# Altium PCB SPI-主板-开关.PcbDoc (part 7 of 11)
Units mm, origin at the board's own origin, x right, y up, seen from the top; angles counter-clockwise.
Board outline 97.69 x 103.45 mm, 2 copper layers (Top Layer, Bottom Layer); 86 components, 63 nets, 260 pads, 250 vias.
Unrouted connection lines stored in the file: 6.
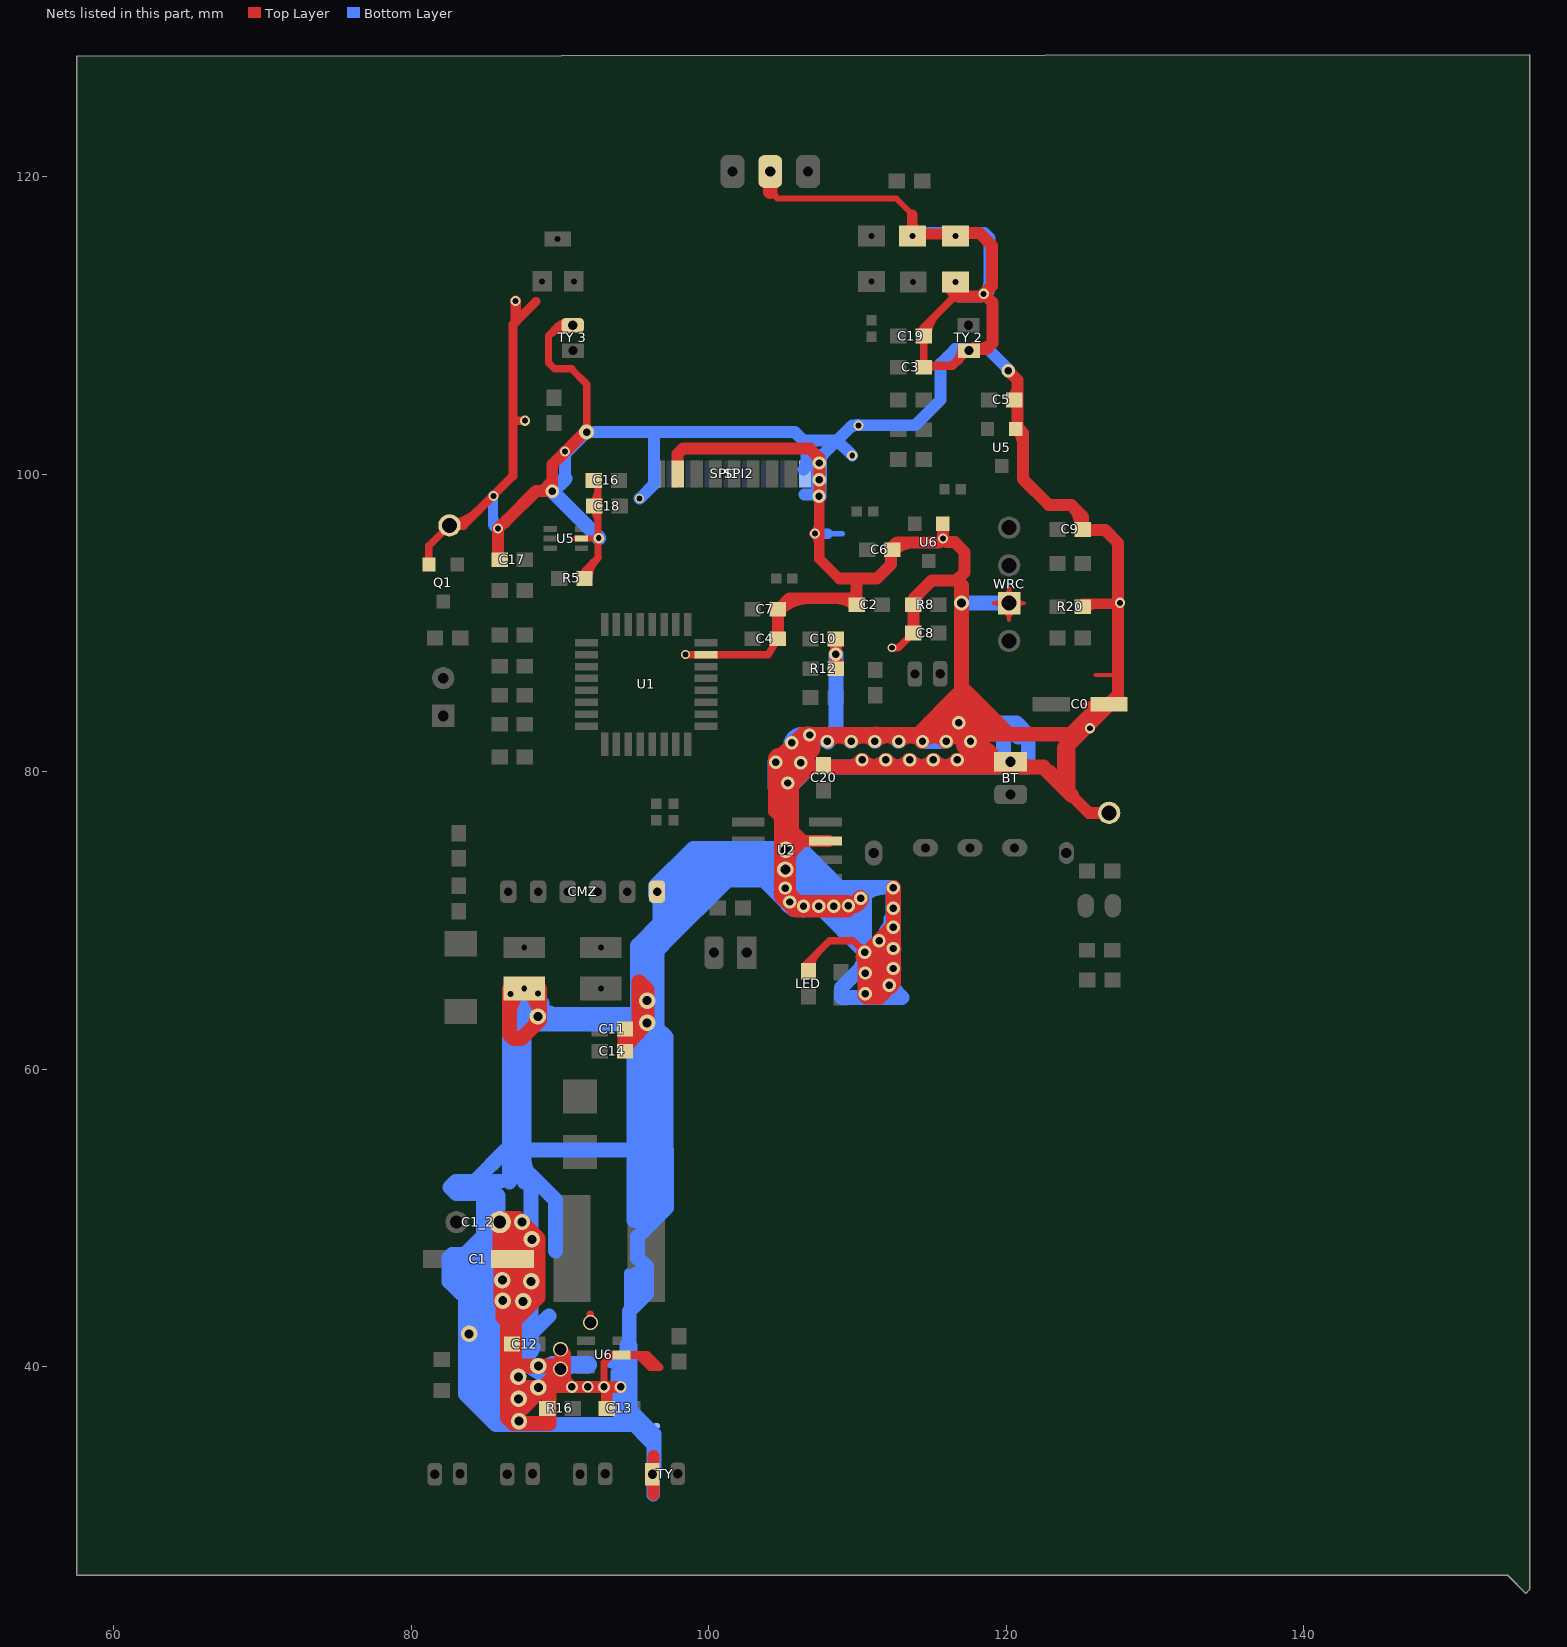
[diagram p7: the nets of this part, all layers, seen from the top]

## Via types
v1: diameter 0.9, hole 0.5, Top Layer to Bottom Layer, 104 vias
v2: diameter 0.68, hole 0.4, Top Layer to Bottom Layer, 100 vias
v3: diameter 1.1, hole 0.6, Top Layer to Bottom Layer, tented both sides, 16 vias
v4: diameter 1, hole 0.8, Top Layer to Bottom Layer, tented both sides, 8 vias
v5: diameter 1, hole 0.6, Top Layer to Bottom Layer, 4 vias
v6: diameter 0.8, hole 0.5, Top Layer to Bottom Layer, 4 vias
v7: diameter 0.7, hole 0.4, Top Layer to Bottom Layer, 4 vias
v8: diameter 0.6, hole 0.4, Top Layer to Bottom Layer, 3 vias
v9: diameter 1.1, hole 0.68, Top Layer to Bottom Layer, 2 vias
v10: diameter 0.8, hole 0.4, Top Layer to Bottom Layer, 2 vias
v11: diameter 1, hole 0.5, Top Layer to Bottom Layer, 1 vias
v12: diameter 0.9, hole 0.6, Top Layer to Bottom Layer, tented bottom, 1 vias
v13: diameter 1.2, hole 0.68, Top Layer to Bottom Layer, 1 vias

## Nets (pads, with @x,y where several pads share a name; then routed paths per layer and width w, separated by ;. In a path a pad name is that pad's centre, name@x,y a point inside that pad or via, vN(x,y) a via of type N, cw(c..) or ccw(c..) an arc to the next point about the centre after c; other vN are vias at no path point) (continued)
GND: (continued)
  Bottom Layer w1: 83.109,47.346 83.109,45.999 83.058,45.949 83.642,45.364 ; v3(83.896,42.215) 83.896,40.538 84.112,40.322 ; v3@84.099,42.603 84.099,44.907 ; 84.277,52.476 86.377,54.576 94.971,54.576 ; v3@84.404,42.298 84.741,42.298 84.995,42.552 ; 84.7,42.002 84.7,41.977 ; 84.712,41.99 84.7,41.977 ; 84.861,51.689 84.861,51.638 ; 85.014,50.343 85.014,43.993 ; 85.09,50.343 85.09,49.657 C1_2.1@85.42,49.327 ; 85.119,41.279 85.271,41.431 86.055,42.215 ; 85.242,40.366 85.242,39.192 ; 85.344,50.673 85.42,50.673 ; 85.852,48.654 85.852,51.486 84.861,52.476 ; 85.862,46.304 85.555,46.612 ; 86.004,52.476 84.861,52.476 ; 86.614,36.386 86.614,39.167 84.734,41.046 ; 86.614,52.426 86.614,63.833 ; 86.778,54.872 86.778,54.951 ; 86.868,41.021 86.893,41.046 ; 87.147,42.792 87.916,43.561 ; v3@87.396,44.071 86.792,43.466 ; 87.6,52.68 87.6,62.944 ; 87.8,53.119 88.062,52.857 ; 89.256,43.409 88.062,42.215 ; 89.704,47.777 89.704,51.215 88.062,52.857 ; 90.348,99.72 v1(89.484,98.857) 92.608,95.733 v2(92.608,95.707) ; 94.615,37.186 94.656,37.144 ; 94.742,36.108 86.055,36.108 ; 94.971,49.835 94.971,54.576 ; 94.971,62.407 94.971,54.576 ; 95.098,49.835 95.758,50.495 ; 95.148,46.228 95.148,44.806 95.225,44.729 ; 95.326,50.927 95.326,51.155 ; TY.2@96.314,32.774 96.314,34.774 ; 96.52,68.123 96.52,62.789 97.13,62.179 97.13,54.576 ; CMZ.2@96.53,71.944 97.866,71.944 99.274,71.944 99.606,72.276 ; 96.901,50.419 96.901,54.576 ; 97.13,50.648 97.13,54.576 ; v9(105.181,74.752) 106.274,74.752 108.179,72.847 108.179,72.517 ; 106.136,72.507 106.451,72.822 106.959,73.33 ; v1@107.298,98.645 v1(107.417,98.527) ; v1@107.417,98.501 v1(107.417,98.527) ; v1@107.417,99.593 v1(107.417,98.527) ; v1@107.442,99.492 v1(107.442,99.644) v1(107.442,100.762) v1@107.442,101.092 ; 107.518,73.508 108.788,72.238 ; v1@108.179,70.915 v1@108.179,70.917 ; 108.179,71.806 108.179,72.517 ; v1@108.56,87.909 108.56,82.525 ; 110.134,69.52 109.41,70.244 ; v1(114.375,82.042) 115.545,82.042 116.027,82.525 ; v5@117.17,91.345 WRC.2@120.2,91.345 ; 120.828,82.321 119.99,83.16 119.99,83.287 ; 83.642,44.907 84.099,44.907 ; 83.642,44.907 83.363,44.907 82.55,45.72 82.55,47.346 82.752,47.547 83.642,47.547 ; 83.642,44.907 83.642,45.364 ; 83.642,44.907 83.642,43.06 83.642,38.151 84.112,37.681 ; 83.642,45.364 84.099,44.907 ; 83.642,45.364 83.642,47.547 ; 83.642,47.547 83.947,47.547 84.099,47.395 84.099,44.907 ; 83.642,47.547 83.642,47.6 84.861,48.819 84.861,51.638 ; 83.708,45.202 cw(c82.765,44.258) 84.099,44.258 ; 83.708,45.202 cw(c81.416,42.909) 84.658,42.909 ; 83.708,45.202 cw(c82.765,44.258) 84.099,44.258 ; 83.708,45.202 cw(c81.416,42.909) 84.658,42.909 ; 83.708,45.202 cw(c82.765,44.258) 84.099,44.258 ; 83.708,45.202 cw(c81.416,42.909) 84.658,42.909 ; 83.708,45.273 ccw(c82.765,46.217) 84.099,46.217 ; 83.708,45.273 ccw(c81.416,47.566) 84.658,47.566 ; 83.708,45.273 ccw(c82.765,46.217) 84.099,46.217 ; 83.708,45.273 ccw(c81.416,47.566) 84.658,47.566 ; 83.708,45.273 ccw(c82.765,46.217) 84.099,46.217 ; 83.708,45.273 ccw(c81.416,47.566) 84.658,47.566 ; 84.099,44.907 85.014,43.993 ; 84.112,37.681 85.685,36.108 86.055,36.108 ; 84.112,37.681 84.7,37.681 ; 84.112,37.681 84.112,40.322 ; 84.112,40.322 84.112,41.389 84.7,41.977 ; 84.112,40.322 84.7,39.735 ; 84.7,37.681 85.103,37.681 85.242,37.821 ; 84.7,37.681 84.7,39.735 ; 84.7,37.681 84.7,37.464 86.055,36.108 ; 84.7,39.735 85.242,39.192 ; 84.7,39.735 84.7,41.977 ; 84.734,41.046 ccw(c86.12,42.432) 86.354,40.486 ; 84.734,41.046 ccw(c86.12,42.432) 86.354,40.486 ; 84.734,41.046 ccw(c86.12,42.432) 86.354,40.486 ; 84.734,41.046 85.656,41.046 ; 84.861,51.638 83.033,51.638 82.601,52.07 83.007,52.476 84.861,52.476 ; 84.995,42.552 85.014,42.57 ; 84.995,42.552 85.014,42.552 85.014,42.57 ; 84.995,42.552 84.741,42.552 85.014,42.824 ; 85.014,42.57 85.014,42.824 ; 85.014,42.57 85.598,43.155 85.598,43.409 85.555,43.452 ; 85.014,42.824 85.014,43.993 ; 85.014,42.824 85.555,43.365 85.555,43.452 ; 85.014,43.993 85.555,43.452 ; 85.242,37.821 85.496,38.075 85.496,37.16 85.166,37.49 85.242,37.567 85.242,37.821 ; 85.242,37.821 85.242,39.192 ; 85.242,39.192 86.055,38.379 86.055,36.108 ; 85.242,46.924 cw(c85.685,46.482) 86.122,46.929 ; 85.242,46.924 cw(c85.685,46.482) 86.122,46.929 ; 85.242,46.924 cw(c85.685,46.482) 86.122,46.929 ; 85.242,46.924 85.42,47.102 ; 85.242,46.924 85.555,46.612 ; 85.42,46.912 cw(c87.084,46.912) 86.159,48.295 ; 85.42,46.912 cw(c87.084,46.912) 86.159,48.295 ; 85.42,46.912 cw(c87.084,46.912) 86.159,48.295 ; 85.42,47.102 ccw(c85.837,47.519) 86.132,47.008 ; 85.42,47.102 ccw(c85.837,47.519) 86.132,47.008 ; 85.42,47.102 ccw(c85.837,47.519) 86.132,47.008 ; 85.42,47.102 85.555,46.967 85.555,46.612 ; 85.42,47.102 C1_2.1@85.42,49.327 ; 85.42,47.102 85.95,47.632 ; 85.42,48.864 ccw(c88.056,48.864) 86.192,47 ; 85.42,48.864 ccw(c88.056,48.864) 86.192,47 ; 85.42,48.864 ccw(c88.056,48.864) 86.192,47 ; C1_2.1@85.42,49.327 ccw(c86.395,49.327) 86.144,48.385 ; C1_2.1@85.42,49.327 ccw(c86.395,49.327) 86.144,48.385 ; C1_2.1@85.42,49.327 ccw(c86.395,49.327) 86.144,48.385 ; 85.555,43.452 85.555,46.612 ; 85.555,45.391 cw(c87.731,45.391) 86.192,46.929 ; 85.555,45.391 cw(c87.731,45.391) 86.192,46.929 ; 85.555,45.391 cw(c87.731,45.391) 86.192,46.929 ; 85.555,46.267 cw(c86.204,46.267) 86.16,46.915 ; 85.555,46.267 cw(c86.204,46.267) 86.16,46.915 ; 85.555,46.267 cw(c86.204,46.267) 86.16,46.915 ; 85.555,46.267 cw(c86.204,46.267) 86.16,46.915 ; 85.555,46.267 cw(c86.204,46.267) 86.16,46.915 ; 85.555,46.267 cw(c86.204,46.267) 86.16,46.915 ; 85.656,41.046 cw(c85.656,40.391) 86.31,40.434 ; 85.656,41.046 cw(c85.656,40.391) 86.31,40.434 ; 85.656,41.046 cw(c85.656,40.391) 86.31,40.434 ; 85.674,41.046 cw(c85.674,40.41) 86.31,40.435 ccw(c85.674,40.41) 85.674,41.046 ; 85.674,41.046 86.893,41.046 ; 85.676,47.358 ccw(c84.698,48.336) 86.081,48.336 ; 85.676,47.358 ccw(c84.698,48.336) 86.081,48.336 ; 85.676,47.358 ccw(c84.698,48.336) 86.081,48.336 ; 85.95,42.624 85.95,47.632 ; 85.95,42.624 86.792,43.466 ; 85.95,42.624 85.95,42.472 86.792,43.314 86.792,43.466 ; 85.95,46.345 cw(c86.777,46.345) 86.192,46.929 ; 85.95,46.345 cw(c86.777,46.345) 86.192,46.929 ; 85.95,46.345 cw(c86.777,46.345) 86.192,46.929 ; 85.95,47.585 ccw(c86.777,47.585) 86.192,47 ; 85.95,47.585 ccw(c86.777,47.585) 86.192,47 ; 85.95,47.585 ccw(c86.777,47.585) 86.192,47 ; 85.95,47.585 ccw(c86.777,47.585) 86.192,47 ; 85.95,47.585 ccw(c86.777,47.585) 86.192,47 ; 85.95,47.585 ccw(c86.777,47.585) 86.192,47 ; 85.95,47.585 ccw(c86.777,47.585) 86.192,47 ; 85.95,47.585 ccw(c86.777,47.585) 86.192,47 ; 85.95,47.585 ccw(c86.777,47.585) 86.192,47 ; 85.95,47.632 ccw(c85.506,48.075) 86.085,48.317 ; 85.95,47.632 ccw(c85.506,48.075) 86.085,48.317 ; 85.95,47.632 ccw(c85.506,48.075) 86.085,48.317 ; 85.95,47.632 ccw(c85.506,48.075) 86.085,48.317 ; 85.95,47.632 ccw(c85.506,48.075) 86.085,48.317 ; 85.95,47.632 ccw(c85.506,48.075) 86.085,48.317 ; 85.95,47.632 86.792,48.473 ; 85.95,47.778 cw(c86.69,47.778) 86.167,48.301 ; 85.95,47.778 cw(c86.69,47.778) 86.167,48.301 ; 85.95,47.778 cw(c86.69,47.778) 86.167,48.301 ; 85.95,47.778 cw(c86.69,47.778) 86.167,48.301 ; 85.95,47.778 cw(c86.69,47.778) 86.167,48.301 ; 85.95,47.778 cw(c86.69,47.778) 86.167,48.301 ; 85.95,47.778 cw(c86.69,47.778) 86.167,48.301 ; 85.95,47.778 cw(c86.69,47.778) 86.167,48.301 ; 85.95,47.778 cw(c86.69,47.778) 86.167,48.301 ; 85.95,48.895 ccw(c86.69,48.895) 86.167,48.372 ; 85.95,48.895 ccw(c86.69,48.895) 86.167,48.372 ; 85.95,48.895 ccw(c86.69,48.895) 86.167,48.372 ; 86.032,47.242 cw(c86.712,47.693) 86.165,48.299 ; 86.032,47.242 cw(c86.712,47.693) 86.165,48.299 ; 86.032,47.242 cw(c86.712,47.693) 86.165,48.299 ; 86.032,47.242 cw(c86.712,47.693) 86.165,48.299 ; 86.032,47.242 cw(c86.712,47.693) 86.165,48.299 ; 86.032,47.242 cw(c86.712,47.693) 86.165,48.299 ; 86.048,41.046 cw(c86.048,38.931) 87.544,40.427 ; 86.048,41.046 cw(c86.048,38.931) 87.544,40.427 ; 86.048,41.046 cw(c86.048,38.931) 87.544,40.427 ; 86.096,48.301 cw(c84.416,46.621) 86.792,46.621 ; 86.096,48.301 cw(c84.416,46.621) 86.792,46.621 ; 86.096,48.301 cw(c84.416,46.621) 86.792,46.621 ; 86.102,48.296 cw(c85.656,47.674) 86.288,47.241 ; 86.102,48.296 cw(c85.656,47.674) 86.288,47.241 ; 86.102,48.296 cw(c85.656,47.674) 86.288,47.241 ; 86.102,48.296 cw(c85.656,47.674) 86.288,47.241 ; 86.102,48.296 cw(c85.656,47.674) 86.288,47.241 ; 86.102,48.296 cw(c85.656,47.674) 86.288,47.241 ; 86.11,48.291 cw(c85.896,47.826) 86.392,47.701 ; 86.11,48.291 cw(c85.896,47.826) 86.392,47.701 ; 86.11,48.291 cw(c85.896,47.826) 86.392,47.701 ; 86.11,48.291 cw(c85.896,47.826) 86.392,47.701 ; 86.11,48.291 cw(c85.896,47.826) 86.392,47.701 ; 86.11,48.291 cw(c85.896,47.826) 86.392,47.701 ; 86.121,46.929 cw(c84.503,45.311) 86.792,45.311 ; 86.121,46.929 cw(c84.503,45.311) 86.792,45.311 ; 86.121,46.929 cw(c84.503,45.311) 86.792,45.311 ; 86.123,47.002 ccw(c85.58,47.6) 86.266,48.027 ; 86.123,47.002 ccw(c85.58,47.6) 86.266,48.027 ; 86.123,47.002 ccw(c85.58,47.6) 86.266,48.027 ; 86.124,47.002 ccw(c84.838,48.473) 86.792,48.473 ; 86.124,47.002 ccw(c84.838,48.473) 86.792,48.473 ; 86.124,47.002 ccw(c84.838,48.473) 86.792,48.473 ; 86.152,48.382 ccw(c86.391,48.925) 86.859,48.56 ; 86.152,48.382 ccw(c86.391,48.925) 86.859,48.56 ; 86.152,48.382 ccw(c86.391,48.925) 86.859,48.56 ; 86.152,48.382 ccw(c86.391,48.925) 86.859,48.56 ; 86.152,48.382 ccw(c86.391,48.925) 86.859,48.56 ; 86.152,48.382 ccw(c86.391,48.925) 86.859,48.56 ; 86.155,48.38 ccw(c86.411,48.854) 86.792,48.473 ; 86.155,48.38 ccw(c86.411,48.854) 86.792,48.473 ; 86.155,48.38 ccw(c86.411,48.854) 86.792,48.473 ; 86.207,46.967 cw(c88.209,47.056) 86.792,48.473 ; 86.207,46.967 cw(c88.209,47.056) 86.792,48.473 ; 86.207,46.967 cw(c88.209,47.056) 86.792,48.473 ; 86.395,40.401 cw(c87.952,38.844) 87.952,41.046 ; 86.395,40.401 cw(c87.952,38.844) 87.952,41.046 ; 86.395,40.401 cw(c87.952,38.844) 87.952,41.046 ; 86.401,40.408 cw(c86.939,40.029) 87.286,40.587 ; 86.401,40.408 cw(c86.939,40.029) 87.286,40.587 ; 86.401,40.408 cw(c86.939,40.029) 87.286,40.587 ; 86.401,40.408 cw(c86.939,40.029) 87.286,40.587 ; 86.41,40.442 cw(c88.957,40.691) 87.147,42.501 ; 86.41,40.442 cw(c88.957,40.691) 87.147,42.501 ; 86.41,40.442 cw(c88.957,40.691) 87.147,42.501 ; 86.646,40.553 cw(c87.017,39.941) 87.543,40.428 ; 86.646,40.553 cw(c87.017,39.941) 87.543,40.428 ; 86.646,40.553 cw(c87.017,39.941) 87.543,40.428 ; 86.731,53.985 ccw(c84.633,56.083) 87.6,56.083 ; 86.731,53.985 ccw(c84.633,56.083) 87.6,56.083 ; 86.731,53.985 ccw(c84.633,56.083) 87.6,56.083 ; 86.742,53.906 cw(c85.902,52.43) 87.6,52.43 ; 86.742,53.906 cw(c85.902,52.43) 87.6,52.43 ; 86.742,53.906 cw(c85.902,52.43) 87.6,52.43 ; 86.792,43.466 86.792,48.473 ; 86.792,45.015 cw(c89.427,45.015) 87.564,46.878 ; 86.792,45.015 cw(c89.427,45.015) 87.564,46.878 ; 86.792,45.015 cw(c89.427,45.015) 87.564,46.878 ; 86.792,48.473 ccw(c88.681,48.473) 87.558,46.954 ; 86.792,48.473 ccw(c88.681,48.473) 87.558,46.954 ; 86.792,48.473 ccw(c88.681,48.473) 87.558,46.954 ; 86.893,41.046 88.062,42.215 ; 86.893,41.046 88.062,41.046 88.062,42.215 ; 87.493,46.878 cw(c86.12,45.505) v3@88.062,45.505 ; 87.493,46.878 cw(c86.12,45.505) v3@88.062,45.505 ; 87.493,46.878 cw(c86.12,45.505) v3@88.062,45.505 ; 87.494,46.95 ccw(c86.267,48.26) v3@88.062,48.26 ; 87.494,46.95 ccw(c86.267,48.26) v3@88.062,48.26 ; 87.494,46.95 ccw(c86.267,48.26) v3@88.062,48.26 ; 87.544,40.498 ccw(c86.293,41.748) 88.062,41.748 ; 87.544,40.498 ccw(c86.293,41.748) 88.062,41.748 ; 87.544,40.498 ccw(c86.293,41.748) 88.062,41.748 ; 87.554,40.506 ccw(c86.877,41.679) 88.185,41.328 ; 87.554,40.506 ccw(c86.877,41.679) 88.185,41.328 ; 87.554,40.506 ccw(c86.877,41.679) 88.185,41.328 ; 87.6,53.869 ccw(c89.124,53.869) 88.046,52.791 ; 87.6,53.869 ccw(c89.124,53.869) 88.046,52.791 ; 87.6,53.869 ccw(c89.124,53.869) 88.046,52.791 ; 87.615,40.498 ccw(c89.785,42.668) v4@89.785,39.599 ; 87.615,40.498 ccw(c89.785,42.668) v4@89.785,39.599 ; 87.615,40.498 ccw(c89.785,42.668) v4@89.785,39.599 ; 87.622,40.488 ccw(c89.521,41.627) 88.984,39.479 ; 87.622,40.488 ccw(c89.521,41.627) 88.984,39.479 ; 87.622,40.488 ccw(c89.521,41.627) 88.984,39.479 ; 88.062,42.215 v3(88.062,45.745) 88.062,52.857 ; 94.656,37.144 94.656,43.729 95.809,44.882 95.809,46.736 95.225,47.32 95.225,48.743 97.176,50.694 97.176,54.576 97.13,54.576 ; 94.656,37.144 96.314,35.486 96.314,34.774 ; 94.656,37.144 94.656,36.432 96.314,34.774 ; 94.971,54.576 96.901,54.576 ; 95.747,65.25 cw(c95.429,64.206) 96.52,64.206 ; 95.747,65.25 cw(c95.429,64.206) 96.52,64.206 ; 95.747,65.25 cw(c95.429,64.206) 96.52,64.206 ; 95.758,50.495 96.368,49.886 96.368,50.165 96.266,50.063 96.266,62.509 96.52,62.763 ; 95.758,50.495 95.327,50.926 95.327,62.763 96.52,62.763 ; 95.768,65.166 ccw(c93.952,66.982) 96.52,66.982 ; 95.768,65.166 ccw(c93.952,66.982) 96.52,66.982 ; 95.768,65.166 ccw(c93.952,66.982) 96.52,66.982 ; 96.52,62.763 96.533,62.751 96.901,62.382 96.901,54.576 ; 96.901,54.576 97.13,54.576 ; v1@104.47,80.67 ccw(c106.198,80.67) v1@105.282,79.206 ; v1@104.47,80.67 ccw(c106.198,80.67) v1@105.282,79.206 ; v1@104.47,80.67 ccw(c106.198,80.67) v1@105.282,79.206 ; v1@104.47,80.67 104.47,78.965 104.696,78.74 ; v1@104.47,80.67 106.324,82.525 ; 104.696,78.74 ccw(c104.696,79.429) v1@105.356,79.234 ; 104.696,78.74 ccw(c104.696,79.429) v1@105.356,79.234 ; 104.696,78.74 ccw(c104.696,79.429) v1@105.356,79.234 ; 104.696,78.74 105.258,78.74 106.832,80.315 118.828,80.315 ; v1@105.308,79.198 ccw(c105.308,80.181) 106.004,79.486 ; v1@105.308,79.198 ccw(c105.308,80.181) 106.004,79.486 ; v1@105.308,79.198 ccw(c105.308,80.181) 106.004,79.486 ; v1@105.321,79.2 ccw(c105.05,80.211) 105.957,79.688 ; v1@105.321,79.2 ccw(c105.05,80.211) 105.957,79.688 ; v1@105.321,79.2 ccw(c105.05,80.211) 105.957,79.688 ; v1@105.321,79.2 ccw(c105.05,80.211) 105.957,79.688 ; v1@105.321,79.2 ccw(c105.05,80.211) 105.957,79.688 ; v1@105.321,79.2 ccw(c105.05,80.211) 105.957,79.688 ; v1@105.541,81.983 cw(c106.324,81.687) 106.324,82.525 ; v1@105.541,81.983 cw(c106.324,81.687) 106.324,82.525 ; v1@105.541,81.983 cw(c106.324,81.687) 106.324,82.525 ; v1@105.552,82.001 cw(c106.816,80.737) v1@106.816,82.525 ; v1@105.552,82.001 cw(c106.816,80.737) v1@106.816,82.525 ; v1@105.552,82.001 cw(c106.816,80.737) v1@106.816,82.525 ; v1@105.618,79.101 ccw(c104.099,80.62) v1@106.247,80.62 ; v1@105.618,79.101 ccw(c104.099,80.62) v1@106.247,80.62 ; v1@105.618,79.101 ccw(c104.099,80.62) v1@106.247,80.62 ; 106,82.2 cw(c106.782,81.418) v1@106.782,82.524 ; 106,82.2 cw(c106.782,81.418) v1@106.782,82.524 ; 106,82.2 cw(c106.782,81.418) v1@106.782,82.524 ; v1@106.162,80.584 ccw(c106.813,81.235) 106.813,80.315 ; v1@106.162,80.584 ccw(c106.813,81.235) 106.813,80.315 ; v1@106.162,80.584 ccw(c106.813,81.235) 106.813,80.315 ; v1@106.162,80.584 ccw(c106.813,81.235) 106.813,80.315 ; v1@106.162,80.584 ccw(c106.813,81.235) 106.813,80.315 ; v1@106.162,80.584 ccw(c106.813,81.235) 106.813,80.315 ; 106.324,82.525 108.56,82.525 ; v1@106.931,82.525 cw(c106.931,80.998) v1@108.011,82.077 ; v1@106.931,82.525 cw(c106.931,80.998) v1@108.011,82.077 ; v1@106.931,82.525 cw(c106.931,80.998) v1@108.011,82.077 ; v1(107.391,70.968) ccw(c107.936,71.512) v1@108.44,70.93 ; v1(107.391,70.968) ccw(c107.936,71.512) v1@108.44,70.93 ; v1(107.391,70.968) ccw(c107.936,71.512) v1@108.44,70.93 ; v1(107.391,70.968) v1(110.49,67.869) ; v1@107.927,82.057 cw(c108.56,81.864) 108.56,82.525 ; v1@107.927,82.057 cw(c108.56,81.864) 108.56,82.525 ; v1@107.927,82.057 cw(c108.56,81.864) 108.56,82.525 ; v1@107.927,82.057 cw(c108.56,81.864) 108.56,82.525 ; v1@107.927,82.057 cw(c108.56,81.864) 108.56,82.525 ; v1@107.927,82.057 cw(c108.56,81.864) 108.56,82.525 ; v1@107.94,82.077 cw(c109.02,80.998) 109.02,82.525 ; v1@107.94,82.077 cw(c109.02,80.998) 109.02,82.525 ; v1@107.94,82.077 cw(c109.02,80.998) 109.02,82.525 ; v1@108.011,82.007 ccw(c106.685,83.332) 108.56,83.332 ; v1@108.011,82.007 ccw(c106.685,83.332) 108.56,83.332 ; v1@108.011,82.007 ccw(c106.685,83.332) 108.56,83.332 ; 108.179,71.399 ccw(c108.838,71.399) v1@108.372,70.932 ; 108.179,71.399 ccw(c108.838,71.399) v1@108.372,70.932 ; 108.179,71.399 ccw(c108.838,71.399) v1@108.372,70.932 ; 108.179,71.399 ccw(c108.838,71.399) v1@108.372,70.932 ; 108.179,71.399 ccw(c108.838,71.399) v1@108.372,70.932 ; 108.179,71.399 ccw(c108.838,71.399) v1@108.372,70.932 ; 108.179,72.517 cw(c107.199,71.537) v1@108.452,70.946 ; 108.179,72.517 cw(c107.199,71.537) v1@108.452,70.946 ; 108.179,72.517 cw(c107.199,71.537) v1@108.452,70.946 ; 108.179,72.517 109.195,71.501 v1(110.236,71.501) ; v1@108.357,70.968 ccw(c110.689,70.968) 109.04,69.319 ; v1@108.357,70.968 ccw(c110.689,70.968) 109.04,69.319 ; v1@108.357,70.968 ccw(c110.689,70.968) 109.04,69.319 ; 108.56,82.525 cw(c108.56,81.066) v1@109.611,82.077 ; 108.56,82.525 cw(c108.56,81.066) v1@109.611,82.077 ; 108.56,82.525 cw(c108.56,81.066) v1@109.611,82.077 ; 108.56,82.525 116.027,82.525 ; 108.788,72.238 cw(c108.788,70.318) v1@110.275,71.533 ; 108.788,72.238 cw(c108.788,70.318) v1@110.275,71.533 ; 108.788,72.238 cw(c108.788,70.318) v1@110.275,71.533 ; 108.788,72.238 112.395,72.238 112.395,65.43 113.005,64.821 108.941,64.821 108.941,65.507 110.49,67.056 ; 109.118,69.952 ccw(c108.279,70.791) v1@109.447,71.002 ; 109.118,69.952 ccw(c108.279,70.791) v1@109.447,71.002 ; 109.118,69.952 ccw(c108.279,70.791) v1@109.447,71.002 ; 109.118,69.952 109.41,70.244 ; 109.267,80.315 ccw(c109.267,81.842) v1@110.347,80.762 ; 109.267,80.315 ccw(c109.267,81.842) v1@110.347,80.762 ; 109.267,80.315 ccw(c109.267,81.842) v1@110.347,80.762 ; 109.268,71.428 cw(c108.833,70.993) v1@109.448,70.993 ; 109.268,71.428 cw(c108.833,70.993) v1@109.448,70.993 ; 109.268,71.428 cw(c108.833,70.993) v1@109.448,70.993 ; 109.268,71.428 cw(c108.833,70.993) v1@109.448,70.993 ; 109.268,71.428 cw(c108.833,70.993) v1@109.448,70.993 ; 109.268,71.428 cw(c108.833,70.993) v1@109.448,70.993 ; v1@109.348,70.993 ccw(c111.005,70.993) 109.833,69.821 ; v1@109.348,70.993 ccw(c111.005,70.993) 109.833,69.821 ; v1@109.348,70.993 ccw(c111.005,70.993) 109.833,69.821 ; v1@109.356,71.02 cw(c110.236,70.455) v1(110.236,71.501) ; v1@109.356,71.02 cw(c110.236,70.455) v1(110.236,71.501) ; v1@109.356,71.02 cw(c110.236,70.455) v1(110.236,71.501) ; v1@109.358,71.023 ccw(c109.83,70.664) 109.41,70.244 ; v1@109.358,71.023 ccw(c109.83,70.664) 109.41,70.244 ; v1@109.358,71.023 ccw(c109.83,70.664) 109.41,70.244 ; 109.411,70.244 ccw(c109.006,70.648) v1@109.435,71.026 ; 109.411,70.244 ccw(c109.006,70.648) v1@109.435,71.026 ; 109.411,70.244 ccw(c109.006,70.648) v1@109.435,71.026 ; v1@109.54,82.077 cw(c110.62,80.998) 110.62,82.525 ; v1@109.54,82.077 cw(c110.62,80.998) 110.62,82.525 ; v1@109.54,82.077 cw(c110.62,80.998) 110.62,82.525 ; 110.001,66.567 ccw(c108.698,67.869) v1@110.54,67.869 ; 110.001,66.567 ccw(c108.698,67.869) v1@110.54,67.869 ; 110.001,66.567 ccw(c108.698,67.869) v1@110.54,67.869 ; 110.131,82.525 cw(c110.131,80.998) v1@111.211,82.077 ; 110.131,82.525 cw(c110.131,80.998) v1@111.211,82.077 ; 110.131,82.525 cw(c110.131,80.998) v1@111.211,82.077 ; v1@110.201,71.536 cw(c111.894,69.843) 111.894,72.238 ; v1@110.201,71.536 cw(c111.894,69.843) 111.894,72.238 ; v1@110.201,71.536 cw(c111.894,69.843) 111.894,72.238 ; v1(110.236,71.501) 110.49,71.247 v1(110.49,67.869) ; v1@110.271,71.536 cw(c109.743,71.008) 110.49,71.008 ; v1@110.271,71.536 cw(c109.743,71.008) 110.49,71.008 ; v1@110.271,71.536 cw(c109.743,71.008) 110.49,71.008 ; v1@110.276,80.762 ccw(c111.356,81.842) 111.356,80.315 ; v1@110.276,80.762 ccw(c111.356,81.842) 111.356,80.315 ; v1@110.276,80.762 ccw(c111.356,81.842) 111.356,80.315 ; 110.49,67.056 ccw(c110.047,67.499) v1@110.528,67.901 ; 110.49,67.056 ccw(c110.047,67.499) v1@110.528,67.901 ; 110.49,67.056 ccw(c110.047,67.499) v1@110.528,67.901 ; 110.49,67.056 v1(110.49,67.869) ; 110.867,80.315 ccw(c110.867,81.842) v1@111.947,80.762 ; 110.867,80.315 ccw(c110.867,81.842) v1@111.947,80.762 ; 110.867,80.315 ccw(c110.867,81.842) v1@111.947,80.762 ; v1@111.14,82.077 cw(c112.22,80.998) 112.22,82.525 ; v1@111.14,82.077 cw(c112.22,80.998) 112.22,82.525 ; v1@111.14,82.077 cw(c112.22,80.998) 112.22,82.525 ; v1@111.491,68.595 ccw(c109.307,70.779) v1@112.395,70.779 ; v1@111.491,68.595 ccw(c109.307,70.779) v1@112.395,70.779 ; v1@111.491,68.595 ccw(c109.307,70.779) v1@112.395,70.779 ; v1@111.491,68.666 cw(c109.307,66.483) v1@112.395,66.483 ; v1@111.491,68.666 cw(c109.307,66.483) v1@112.395,66.483 ; v1@111.491,68.666 cw(c109.307,66.483) v1@112.395,66.483 ; v1@111.52,68.625 ccw(c112.632,69.427) v1@112.412,68.073 ; v1@111.52,68.625 ccw(c112.632,69.427) v1@112.412,68.073 ; v1@111.52,68.625 ccw(c112.632,69.427) v1@112.412,68.073 ; 111.731,82.525 cw(c111.731,80.998) v1@112.811,82.077 ; 111.731,82.525 cw(c111.731,80.998) v1@112.811,82.077 ; 111.731,82.525 cw(c111.731,80.998) v1@112.811,82.077 ; v1@111.876,80.762 ccw(c112.956,81.842) 112.956,80.315 ; v1@111.876,80.762 ccw(c112.956,81.842) 112.956,80.315 ; v1@111.876,80.762 ccw(c112.956,81.842) 112.956,80.315 ; 111.955,69.29 cw(c112.55,68.893) v1@112.411,69.594 ; 111.955,69.29 cw(c112.55,68.893) v1@112.411,69.594 ; 111.955,69.29 cw(c112.55,68.893) v1@112.411,69.594 ; v1@112.176,65.497 ccw(c111.648,66.025) v1@112.395,66.025 ; v1@112.176,65.497 ccw(c111.648,66.025) v1@112.395,66.025 ; v1@112.176,65.497 ccw(c111.648,66.025) v1@112.395,66.025 ; 112.211,67.265 cw(c113.289,67.519) v1@112.379,68.151 ; 112.211,67.265 cw(c113.289,67.519) v1@112.379,68.151 ; 112.211,67.265 cw(c113.289,67.519) v1@112.379,68.151 ; 112.261,70.109 ccw(c113.034,69.955) v1@112.379,69.517 ; 112.261,70.109 ccw(c113.034,69.955) v1@112.379,69.517 ; 112.261,70.109 ccw(c113.034,69.955) v1@112.379,69.517 ; 112.467,80.315 ccw(c112.467,81.842) v1@113.547,80.762 ; 112.467,80.315 ccw(c112.467,81.842) v1@113.547,80.762 ; 112.467,80.315 ccw(c112.467,81.842) v1@113.547,80.762 ; v1@112.74,82.077 cw(c113.82,80.998) 113.82,82.525 ; v1@112.74,82.077 cw(c113.82,80.998) 113.82,82.525 ; v1@112.74,82.077 cw(c113.82,80.998) 113.82,82.525 ; 113.331,82.525 cw(c113.331,80.998) v1@114.411,82.077 ; 113.331,82.525 cw(c113.331,80.998) v1@114.411,82.077 ; 113.331,82.525 cw(c113.331,80.998) v1@114.411,82.077 ; v1@113.476,80.762 ccw(c114.556,81.842) 114.556,80.315 ; v1@113.476,80.762 ccw(c114.556,81.842) 114.556,80.315 ; v1@113.476,80.762 ccw(c114.556,81.842) 114.556,80.315 ; 114.067,80.315 ccw(c114.067,81.842) v1@115.147,80.762 ; 114.067,80.315 ccw(c114.067,81.842) v1@115.147,80.762 ; 114.067,80.315 ccw(c114.067,81.842) v1@115.147,80.762 ; v1@114.34,82.077 cw(c115.42,80.998) 115.42,82.525 ; v1@114.34,82.077 cw(c115.42,80.998) 115.42,82.525 ; v1@114.34,82.077 cw(c115.42,80.998) 115.42,82.525 ; 114.931,82.525 cw(c114.931,80.998) v1@116.011,82.077 ; 114.931,82.525 cw(c114.931,80.998) v1@116.011,82.077 ; 114.931,82.525 cw(c114.931,80.998) v1@116.011,82.077 ; v1@115.076,80.762 ccw(c116.156,81.842) 116.156,80.315 ; v1@115.076,80.762 ccw(c116.156,81.842) 116.156,80.315 ; v1@115.076,80.762 ccw(c116.156,81.842) 116.156,80.315 ; 115.667,80.315 ccw(c115.667,81.842) v1@116.747,80.762 ; 115.667,80.315 ccw(c115.667,81.842) v1@116.747,80.762 ; 115.667,80.315 ccw(c115.667,81.842) v1@116.747,80.762 ; v1@115.925,82.042 cw(c116.844,82.042) 116.194,82.692 ; v1@115.925,82.042 cw(c116.844,82.042) 116.194,82.692 ; v1@115.925,82.042 cw(c116.844,82.042) 116.194,82.692 ; v1@115.94,82.077 cw(c117.02,80.998) 117.02,82.525 ; v1@115.94,82.077 cw(c117.02,80.998) 117.02,82.525 ; v1@115.94,82.077 cw(c117.02,80.998) 117.02,82.525 ; 116.027,82.525 ccw(c116.027,83.364) v1@116.864,83.309 ; 116.027,82.525 ccw(c116.027,83.364) v1@116.864,83.309 ; 116.027,82.525 ccw(c116.027,83.364) v1@116.864,83.309 ; 116.027,82.525 119.507,82.525 119.812,82.829 119.812,81.299 118.828,80.315 ; 116.027,82.525 116.789,83.287 119.99,83.287 ; 116.558,82.525 cw(c116.558,80.998) v1@117.637,82.077 ; 116.558,82.525 cw(c116.558,80.998) v1@117.637,82.077 ; 116.558,82.525 cw(c116.558,80.998) v1@117.637,82.077 ; v1@116.676,80.762 ccw(c117.756,81.842) 117.756,80.315 ; v1@116.676,80.762 ccw(c117.756,81.842) 117.756,80.315 ; v1@116.676,80.762 ccw(c117.756,81.842) 117.756,80.315 ; v1@116.779,83.277 ccw(c118.595,85.092) 118.595,82.525 ; v1@116.779,83.277 ccw(c118.595,85.092) 118.595,82.525 ; v1@116.779,83.277 ccw(c118.595,85.092) 118.595,82.525 ; v1@117.567,82.077 cw(c118.646,80.998) 118.646,82.525 ; v1@117.567,82.077 cw(c118.646,80.998) 118.646,82.525 ; v1@117.567,82.077 cw(c118.646,80.998) 118.646,82.525 ; 118.828,80.315 cw(c119.385,79.758) BT.2@119.773,80.443 ; 118.828,80.315 cw(c119.385,79.758) BT.2@119.773,80.443 ; 118.828,80.315 cw(c119.385,79.758) BT.2@119.773,80.443 ; 118.828,80.315 121.488,80.315 ; 118.86,80.315 ccw(c118.86,81.561) BT.2@119.741,80.68 ; 118.86,80.315 ccw(c118.86,81.561) BT.2@119.741,80.68 ; 118.86,80.315 ccw(c118.86,81.561) BT.2@119.741,80.68 ; 118.86,80.315 ccw(c118.86,81.561) BT.2@119.741,80.68 ; 118.86,80.315 ccw(c118.86,81.561) BT.2@119.741,80.68 ; 118.86,80.315 ccw(c118.86,81.561) BT.2@119.741,80.68 ; 118.86,80.315 ccw(c118.86,81.561) BT.2@119.741,80.68 ; 118.86,80.315 ccw(c118.86,81.561) BT.2@119.741,80.68 ; 118.86,80.315 ccw(c118.86,81.561) BT.2@119.741,80.68 ; 119.99,83.287 120.701,83.287 121.488,82.499 121.488,80.315 ; BT.2@120.874,80.654 ccw(c121.488,81.041) 121.488,80.315 ; BT.2@120.874,80.654 ccw(c121.488,81.041) 121.488,80.315 ; BT.2@120.874,80.654 ccw(c121.488,81.041) 121.488,80.315 ; 84.768,41.046 cw(c84.768,38.844) 86.325,40.401 ccw(c84.768,38.844) 84.768,41.046 ; 85.674,40.589 ccw(c86.081,40.996) 86.338,40.482 cw(c86.081,40.996) 85.674,40.589
  Bottom Layer w1.2: pad.0@87.663,65.312 88.197,64.778 88.205,64.77 88.205,63.686 89.289,63.686 89.831,63.144 ; 89.484,40.132 91.897,40.132 ; 94.615,37.186 94.615,41.395 ; 94.971,62.407 95.152,62.588 v3@95.708,63.144 ; 95.152,63.402 94.894,63.144 ; 95.326,63.979 95.326,68.301 96.825,69.799 96.825,71.649 CMZ.2@96.53,71.944 96.53,72.298 98.994,74.762 102.093,74.762 ; 95.656,63.906 95.656,66.345 ; 95.656,66.712 95.656,67.632 ; 96.241,63.677 v3@95.708,63.144 ; 96.52,68.123 97.307,68.91 ; 97.307,71.166 97.866,70.608 97.866,71.944 97.866,72.583 98.867,73.584 98.867,73.203 ; 98.892,72.306 100.576,73.99 99.466,73.99 99.466,73.152 ; 99.606,72.276 102.093,74.762 ; 100.774,73.317 97.307,69.85 97.307,68.91 ; 101.466,73.343 100.96,72.836 ; v9@105.054,73.431 102.768,73.431 102.593,73.256 ; v9(105.181,74.752) 105.171,74.762 102.093,74.762 ; 105.461,72.822 106.451,72.822 ; 105.994,72.365 106.136,72.222 ; 106.136,72.507 106.136,72.222 ; 106.959,73.33 106.426,73.863 ; 107.163,72.822 106.451,72.822 ; 107.213,72.085 105.705,72.085 v1@105.156,71.536 ; v1@108.179,70.917 108.179,71.12 v1@108.179,71.145 ; pad.0@87.847,65.129 ccw(c88.519,65.801) pad.0@88.519,64.85 ; pad.0@87.847,65.129 ccw(c88.519,65.801) pad.0@88.519,64.85 ; pad.0@87.847,65.129 ccw(c88.519,65.801) pad.0@88.519,64.85 ; 88.205,64.188 ccw(c89.156,64.188) v3@88.484,63.515 ; 88.205,64.188 ccw(c89.156,64.188) v3@88.484,63.515 ; 88.205,64.188 ccw(c89.156,64.188) v3@88.484,63.515 ; v3@88.513,63.6 cw(c88.703,62.016) 89.831,63.144 ; v3@88.513,63.6 cw(c88.703,62.016) 89.831,63.144 ; v3@88.513,63.6 cw(c88.703,62.016) 89.831,63.144 ; 89.521,39.537 cw(c90.957,38.1) 90.957,40.132 ; 89.521,39.537 cw(c90.957,38.1) 90.957,40.132 ; 89.521,39.537 cw(c90.957,38.1) 90.957,40.132 ; 89.831,63.144 89.84,63.144 94.894,63.144 ; 94.894,63.144 95.152,63.144 v3@95.708,63.144 ; CMZ.2@96.53,71.744 cw(c95.818,71.032) 96.825,71.032 ; CMZ.2@96.53,71.744 cw(c95.818,71.032) 96.825,71.032 ; CMZ.2@96.53,71.744 cw(c95.818,71.032) 96.825,71.032 ; 97.307,68.91 100.96,72.563 100.96,72.836 ; 100.96,72.836 102.173,72.836 ; 102.173,72.836 102.593,73.256 ; 102.173,72.836 103.014,72.836 ; 102.593,73.256 103.014,72.836 ; 102.593,73.256 101.987,73.863 105.181,73.863 106.426,73.863 ; 103.014,72.836 103.745,72.836 ; 103.156,73.863 ccw(c103.156,76.778) v9@105.217,74.717 ; 103.156,73.863 ccw(c103.156,76.778) v9@105.217,74.717 ; 103.156,73.863 ccw(c103.156,76.778) v9@105.217,74.717 ; 103.745,72.836 105.74,70.841 v1@109.576,70.841 ; 103.745,72.836 104.583,72.836 ; 103.84,72.836 ccw(c103.84,74.748) v9@105.191,73.396 ; 103.84,72.836 ccw(c103.84,74.748) v9@105.191,73.396 ; 103.84,72.836 ccw(c103.84,74.748) v9@105.191,73.396 ; 103.95,72.836 cw(c103.95,70.981) v1@105.262,72.293 ; 103.95,72.836 cw(c103.95,70.981) v1@105.262,72.293 ; 103.95,72.836 cw(c103.95,70.981) v1@105.262,72.293 ; 104.111,72.47 ccw(c105.156,73.514) v1@105.156,72.037 ; 104.111,72.47 ccw(c105.156,73.514) v1@105.156,72.037 ; 104.111,72.47 ccw(c105.156,73.514) v1@105.156,72.037 ; 104.234,73.863 cw(c104.234,72.51) v9@105.191,73.467 ; 104.234,73.863 cw(c104.234,72.51) v9@105.191,73.467 ; 104.234,73.863 cw(c104.234,72.51) v9@105.191,73.467 ; 104.583,72.836 ccw(c104.583,73.46) v9@105.206,73.429 ; 104.583,72.836 cw(c104.583,72.108) v1@105.305,72.207 ; 104.583,72.836 ccw(c104.583,73.46) v9@105.206,73.429 ; 104.583,72.836 cw(c104.583,72.108) v1@105.305,72.207 ; 104.583,72.836 ccw(c104.583,73.46) v9@105.206,73.429 ; 104.583,72.836 cw(c104.583,72.108) v1@105.305,72.207 ; v1@105.006,72.187 ccw(c106.484,72.187) v1@105.439,71.142 ; v1@105.006,72.187 ccw(c106.484,72.187) v1@105.439,71.142 ; v1@105.006,72.187 ccw(c106.484,72.187) v1@105.439,71.142 ; v1@105.027,72.095 cw(c104.334,70.988) v1@105.607,71.281 ; v1@105.027,72.095 cw(c104.334,70.988) v1@105.607,71.281 ; v1@105.027,72.095 cw(c104.334,70.988) v1@105.607,71.281 ; v1@105.05,72.081 ccw(c106.365,73.396) 106.365,71.536 ; v1@105.05,72.081 ccw(c106.365,73.396) 106.365,71.536 ; v1@105.05,72.081 ccw(c106.365,73.396) 106.365,71.536 ; v1@105.05,72.293 cw(c106.327,71.016) 106.327,72.822 ; v1@105.05,72.293 cw(c106.327,71.016) 106.327,72.822 ; v1@105.05,72.293 cw(c106.327,71.016) 106.327,72.822 ; v1@105.068,72.308 cw(c105.552,71.638) 106.136,72.222 ; v1@105.068,72.308 cw(c105.552,71.638) 106.136,72.222 ; v1@105.068,72.308 cw(c105.552,71.638) 106.136,72.222 ; v9@105.12,73.397 ccw(c106.451,74.651) 106.451,72.822 ; v9@105.12,73.397 ccw(c106.451,74.651) 106.451,72.822 ; v9@105.12,73.397 ccw(c106.451,74.651) 106.451,72.822 ; v9@105.121,73.467 cw(c106.078,72.51) 106.078,73.863 ; v9@105.121,73.467 cw(c106.078,72.51) 106.078,73.863 ; v9@105.121,73.467 cw(c106.078,72.51) 106.078,73.863 ; v9@105.135,74.733 ccw(c106.426,75.256) 106.426,73.863 ; v9@105.135,74.733 ccw(c106.426,75.256) 106.426,73.863 ; v9@105.135,74.733 ccw(c106.426,75.256) 106.426,73.863 ; v1@105.156,71.536 ccw(c104.699,71.993) v1@105.294,72.245 ; v1@105.156,71.536 ccw(c104.699,71.993) v1@105.294,72.245 ; v1@105.156,71.536 ccw(c104.699,71.993) v1@105.294,72.245 ; v1@105.156,71.536 108.88,71.536 ; v1@105.311,71.247 cw(c106.382,71.247) 105.625,72.005 ; v1@105.311,71.247 cw(c106.382,71.247) 105.625,72.005 ; v1@105.311,71.247 cw(c106.382,71.247) 105.625,72.005 ; v1@105.33,71.25 ccw(c106.375,72.295) v1@106.375,70.818 ; v1@105.33,71.25 ccw(c106.375,72.295) v1@106.375,70.818 ; v1@105.33,71.25 ccw(c106.375,72.295) v1@106.375,70.818 ; v1@105.355,71.141 ccw(c106.08,71.866) v1@106.08,70.841 ; v1@105.355,71.141 ccw(c106.08,71.866) v1@106.08,70.841 ; v1@105.355,71.141 ccw(c106.08,71.866) v1@106.08,70.841 ; v1@105.355,71.353 cw(c107.122,69.586) 107.122,72.085 ; v1@105.355,71.353 cw(c107.122,69.586) 107.122,72.085 ; v1@105.355,71.353 cw(c107.122,69.586) 107.122,72.085 ; v1@105.365,71.536 cw(c105.365,69.957) v1@106.481,71.074 ; v1@105.365,71.536 cw(c105.365,69.957) v1@106.481,71.074 ; v1@105.365,71.536 cw(c105.365,69.957) v1@106.481,71.074 ; v1@106.269,71.074 cw(c107.385,69.957) 107.385,71.536 ; v1@106.269,71.074 cw(c107.385,69.957) 107.385,71.536 ; v1@106.269,71.074 cw(c107.385,69.957) 107.385,71.536 ; 106.381,71.536 cw(c106.381,69.957) v1@107.497,71.074 ; 106.381,71.536 cw(c106.381,69.957) v1@107.497,71.074 ; 106.381,71.536 cw(c106.381,69.957) v1@107.497,71.074 ; v1@107.285,71.074 cw(c108.401,69.957) 108.401,71.536 ; v1@107.285,71.074 cw(c108.401,69.957) 108.401,71.536 ; v1@107.285,71.074 cw(c108.401,69.957) 108.401,71.536 ; 107.397,71.536 cw(c107.397,69.957) v1@108.513,71.074 ; 107.397,71.536 cw(c107.397,69.957) v1@108.513,71.074 ; 107.397,71.536 cw(c107.397,69.957) v1@108.513,71.074 ; v1@108.258,70.986 cw(c108.88,70.909) 108.88,71.536 ; v1@108.258,70.986 cw(c108.88,70.909) 108.88,71.536 ; v1@108.258,70.986 cw(c108.88,70.909) 108.88,71.536 ; v1@108.355,71.108 cw(c108.756,70.021) v1@109.576,70.841 ; v1@108.355,71.108 cw(c108.756,70.021) v1@109.576,70.841 ; v1@108.355,71.108 cw(c108.756,70.021) v1@109.576,70.841 ; 108.449,71.536 cw(c108.449,70.044) v1@109.504,71.099 ; 108.449,71.536 cw(c108.449,70.044) v1@109.504,71.099 ; 108.449,71.536 cw(c108.449,70.044) v1@109.504,71.099 ; 108.88,71.536 cw(c108.88,70.849) v1@109.542,71.033 ; 108.88,71.536 ccw(c109.7,72.355) v1@110.316,71.374 ; 108.88,71.536 cw(c108.88,70.849) v1@109.542,71.033 ; 108.88,71.536 ccw(c109.7,72.355) v1@110.316,71.374 ; 108.88,71.536 cw(c108.88,70.849) v1@109.542,71.033 ; 108.88,71.536 ccw(c109.7,72.355) v1@110.316,71.374 ; 108.88,71.536 v1@109.576,70.841 ; v1@109.004,70.841 ccw(c109.004,72.733) v1@110.342,71.395 ; v1@109.004,70.841 ccw(c109.004,72.733) v1@110.342,71.395 ; v1@109.004,70.841 ccw(c109.004,72.733) v1@110.342,71.395 ; 109.576,70.567 cw(c110.835,70.567) v1@110.155,71.627 ; 109.576,70.567 cw(c110.835,70.567) v1@110.155,71.627 ; 109.576,70.567 cw(c110.835,70.567) v1@110.155,71.627 ; v1@109.576,70.841 ccw(c109.576,71.673) v1@110.381,71.463 ; v1@109.576,70.841 ccw(c109.576,71.673) v1@110.381,71.463 ; v1@109.576,70.841 ccw(c109.576,71.673) v1@110.381,71.463
  Bottom Layer w1.5: v9@105.181,72.923 105.181,73.863 v9@105.181,74.574 ; v9@105.156,74.6 cw(c104.408,73.852) v9@105.33,73.333 ; v9@105.156,74.6 cw(c104.408,73.852) v9@105.33,73.333 ; v9@105.156,74.6 cw(c104.408,73.852) v9@105.33,73.333 ; v9@105.156,74.6 v9@105.181,74.574 ; v9@105.181,74.574 cw(c104.466,73.859) v9@105.326,73.326 ; v9@105.181,74.574 cw(c104.466,73.859) v9@105.326,73.326 ; v9@105.181,74.574 cw(c104.466,73.859) v9@105.326,73.326
  other v1: 110.515,65.075 112.141,65.659 110.515,66.472 111.455,68.631 106.375,70.968 108.407,70.968 109.398,70.993 105.461,71.247 105.156,72.187 105.308,79.248 106.197,80.62 104.521,80.645 110.312,80.797 111.912,80.797 113.512,80.797 115.112,80.797 116.712,80.797 105.588,81.966 107.975,82.042 109.575,82.042 111.175,82.042 112.775,82.042 115.975,82.042 106.782,82.474
  other v2: 125.628,82.931 127.66,91.364 110.084,103.276
  other v3: 87.249,36.347 87.224,37.846 87.204,39.319 88.55,40.056 87.528,44.399 86.131,45.822 88.113,48.565 88.519,63.551
  other v6: 91.872,38.659
  other v7: 86.665,65.075 88.519,65.1
  other v8: 98.45,87.884
  other v9: 105.156,73.431